# EAGLE board cpu-driver (EAGLE 6.4)
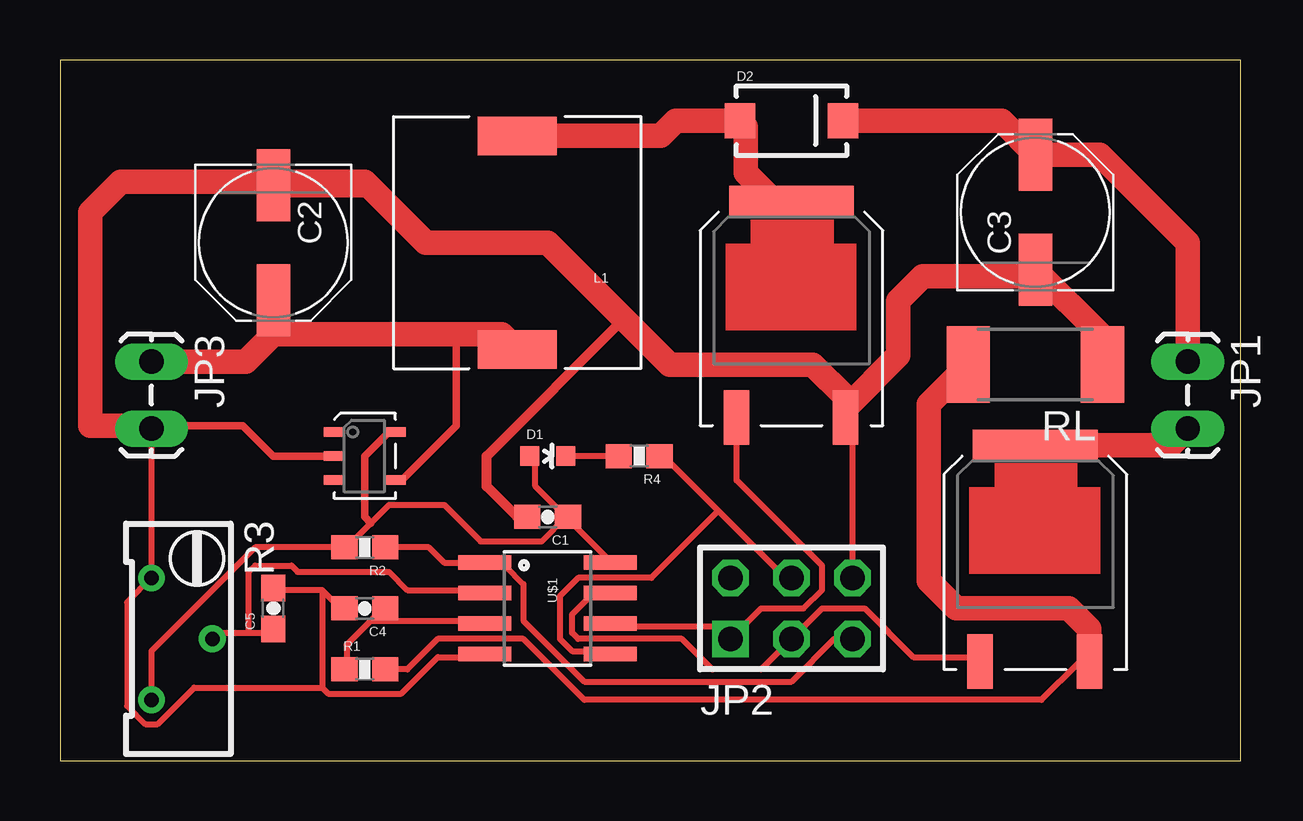
[diagram p0: board, top side]

Size 49.2 x 29.2 mm. Coordinates in mm from the lower left corner, seen from the top.
Outline: 0,0 49.2,0 49.2,29.2 0,29.2 0,0
Copper layers (1*16): Top 0.035mm / dielectric 1.5mm / Bottom 0.035mm
Design rules "default": minimum track width 10mil, minimum drill 0.6mm, track to track 8mil, track to pad 8mil, pad to pad 8mil, via to via 8mil, smd to smd 8mil, copper to edge 40mil, drill to drill 8mil, minimum pad ring 10mil, minimum via ring 8mil, stop-mask expansion 4mil, vias tented up to drill 0mil, thermal gap 10mil

## Footprints (pad centres in the part's own frame; a part is rotated, then mirrored left to right if it is on the bottom)
0603-CAP = smd 1.1 x 1: 1 -0.85,0; 2 0.85,0
PANASONIC_D = smd 3 x 1.4: + 2.4,0; - -2.4,0
LED-0603 = smd 0.8 x 0.8: A 0,-0.75; C 0,0.75
SMA-DIODE = smd 1.27 x 1.47: A -2.15,0; C 2.15,0
1X02_LOCK_LONGPADS = drill 1.016 long: 1 -0.127,0; 2 2.667,0
AVR-ISP-6 = drill 1.016 square: 1 -2.54,-1.27 | drill 1.016 octagon: 2 -2.54,1.27; 3 0,-1.27; 4 0,1.27; 5 2.54,-1.27; 6 2.54,1.27
DR1030 = smd 3.3 x 1.6: 1 0,4.45; 2 0,-4.45
TO-252AA = smd 1.067 x 2.28: 1 -2.3,-4.75; 3 2.25,-4.75 | smd 5.2 x 1.3: 4 0,4.25
0603-RES = smd 1.1 x 1: 1 -0.85,0; 2 0.85,0
RTRIM64Y = drill 0.61: 1 0,-2.54; 2 -2.54,0; 3 0,2.54
R2512 = smd 1.8 x 3.2: 1 -2.8,0; 2 2.8,0
SO08 = smd 0.61 x 2.21: 1 -1.905,-2.616; 2 -0.635,-2.616; 3 0.635,-2.616; 4 1.905,-2.616; 5 1.905,2.616; 6 0.635,2.616; 7 -0.635,2.616; 8 -1.905,2.616
SOT-23-5 = smd 0.406 x 0.813: 1 -1,-1.3; 2 0,-1.3; 3 1,-1.3; 4 1,1.3; 5 -1,1.3

## Placement (x,y rotation side)
C1  1uF  [0603-CAP]  20.32,10.16 180 top
C2  100uF  [PANASONIC_D]  8.89,21.59 270 top
C3  330uF  [PANASONIC_D]  40.64,22.86 90 top
C4  33uF  [0603-CAP]  12.7,6.35 180 top
C5  1uF  [0603-CAP]  8.89,6.35 90 top
D1  RED  [LED-0603]  20.32,12.7 270 top
D2  DIODE-SCHOTTKY_  [SMA-DIODE]  30.48,26.67 0 top
JP1  BOOST-CONN  [1X02_LOCK_LONGPADS]  46.99,16.51 270 top
JP2  AVR-ISP-6  [AVR-ISP-6]  30.48,6.35 0 top
JP3  BATTERY-CONN  [1X02_LOCK_LONGPADS]  3.81,16.51 270 top
L1  180  [DR1030]  19.05,21.59 180 top
Q1  RFD14N05L  [TO-252AA]  30.48,19.05 0 top
Q2  RFD14N05L  [TO-252AA]  40.64,8.89 0 top
R1  100  [0603-RES]  12.7,3.81 0 top
R2  4k7  [0603-RES]  12.7,8.89 180 top
R3  10k  [RTRIM64Y]  3.81,5.08 180 top
R4  220  [0603-RES]  24.13,12.7 180 top
RL  0.2  [R2512]  40.64,16.51 180 top
U$1  ATTINY13SOIC  [SO08]  20.32,6.35 270 top
U$2  [SOT-23-5]  12.7,12.7 270 top

## Library data of the parts
C1 C4 C5 L1 R1 R2 R4 RL = SparkFun-Passives
C2 C3 R3 = resistor
D1 = SparkFun-LED; PROD_ID: DIO-00819
D2 = SparkFun-DiscreteSemi
JP1 JP3 = SparkFun-Connectors
JP2 = avr-4
Q1 Q2 U$2 = Synapseware
U$1 = SparkFun-DigitalIC

## Nets
BOOST+: C3.+ D2.C JP1.1
BOOST-: JP1.2 Q2.4
GND: C1.2 C2.- C3.- C4.2 C5.2 JP2.6 JP3.2 Q1.3 R3.1 RL.1 U$1.4 U$2.2
MISO: JP2.1 Q1.1 U$1.6
MOSI: JP2.4 R4.1 U$1.5
N$1: D1.C R4.2
N$2: D2.A L1.2 Q1.4
N$3: JP2.2
N$1334: Q2.3 R1.2 RL.2
PB3: C5.1 R3.2 U$1.2
PB4: C4.1 R1.1 U$1.3
RES: JP2.5 R2.1 U$1.1
SCK: JP2.3 Q2.1 U$1.7
VBATT: C2.+ JP3.1 L1.1 U$2.4
VCC: C1.1 D1.A R2.2 R3.3 U$1.8 U$2.5

## Tracks (layer width: path | path; a pad name or v marks a point on that pad's centre or on a via)
BOOST+
  Top 1.016: D2.C 39.23,26.67 C3.+ 43.32,25.26 46.99,21.59 JP1.1
BOOST-
  Top 1.016: Q2.4 46.29,13.14 JP1.2
GND
  Top 0.254: 10.92,7.11 8.89,7.11 C5.2 | 10.92,7.11 11.68,6.35 C4.2 | 10.92,3.05 11.18,2.79 14.22,2.79 15.75,4.32 17.53,4.32 U$1.4 | 10.92,7.11 10.92,3.05 | 19.3,10.16 C1.2 | JP3.2 R3.1 2.79,6.6 2.79,2.29 3.56,1.52 4.06,1.52 5.59,3.05 10.92,3.05 | JP2.6 33.02,13.97 Q1.3
  Top 0.305: U$2.2 8.89,12.7 7.62,13.97 3.94,13.97 JP3.2
  Top 0.406: 19.3,10.16 19.05,10.16 17.78,11.43 17.78,12.7 23.5,18.41
  Top 1.016: RL.1 43.44,17.66 C3.- 40.37,20.19 35.94,20.19 34.92,19.18 34.92,16.89 32.73,14.7 Q1.3 32.73,15.15 31.37,16.51 25.4,16.51 23.5,18.41 20.32,21.59 15.24,21.59 12.84,23.99 | C2.- 12.84,23.99 | 12.84,23.99 12.7,24.13 2.54,24.13 1.27,22.86 1.27,13.97 3.68,13.97 JP3.2
MISO
  Top 0.254: U$1.6 23.11,5.59 27.43,5.59 JP2.1 29.21,6.35 30.99,6.35 31.75,7.11 31.75,8.13 28.19,11.68 28.19,14.22 Q1.1
MOSI
  Top 0.254: 27.43,10.41 30.23,7.62 JP2.4 | 27.43,10.41 25.15,12.7 R4.1 | 27.43,10.41 24.64,7.62 21.59,7.62 20.83,6.86 20.83,5.08 21.34,4.57 22.86,4.57 U$1.5
N$1
  Top 0.254: R4.2 D1.C
N$2
  Top 1.016: Q1.4 29.79,23.3 28.57,24.51 28.57,26.43 D2.A 25.65,26.67 25.02,26.04 L1.2
N$1334
  Top 0.254: R1.2 14.48,3.81 15.75,5.08 19.3,5.08 21.84,2.54 40.89,2.54 42.42,4.06 Q2.3
  Top 1.016: Q2.3 42.89,5.5 42.04,6.35 37.34,6.35 36.2,7.49 36.2,14.87 RL.2
PB3
  Top 0.254: 7.87,5.33 6.6,5.33 R3.2 | 7.87,5.33 8.89,5.33 C5.1 | 7.87,5.33 7.87,7.87 8.13,8.13 9.65,8.13 9.91,7.87 13.72,7.87 14.48,7.11 17.53,7.11 U$1.2
PB4
  Top 0.254: 12.95,5.84 13.46,6.35 C4.1 | 12.95,5.84 11.94,4.83 11.94,3.81 R1.1 | 12.95,5.84 17.53,5.84 U$1.3
RES
  Top 0.254: R2.1 15.37,8.89 16,8.26 U$1.1 17.78,8.13 18.54,8.13 19.3,7.37 19.3,5.84 21.84,3.3 30.48,3.3 32.26,5.08 JP2.5
SCK
  Top 0.254: U$1.7 22.86,6.86 22.1,6.86 21.34,6.1 21.34,5.33 21.59,5.08 25.91,5.08 27.18,3.81 29.21,3.81 JP2.3 31.75,6.35 33.53,6.35 35.56,4.32 38.1,4.32 Q2.1
VBATT
  Top 0.305: 16.51,17.78 16.51,13.97 14.24,11.7 U$2.4
  Top 1.016: JP3.1 7.75,16.64 8.89,17.78 | 8.89,17.78 C2.+ | 8.89,17.78 16.51,17.78 18.41,17.78 L1.1
VCC
  Top 0.254: 21.08,10.16 19.81,11.43 19.81,12.7 D1.A | 21.08,10.16 22.86,8.38 U$1.8 | R3.3 3.81,4.57 8.13,8.89 R2.2 11.94,8.89 12.95,9.91 13.72,10.67 16,10.67 17.53,9.14 20.07,9.14 21.08,10.16 | 21.08,10.16 C1.1
  Top 0.305: U$2.5 13.7,13.7 12.7,12.7 12.7,10.16 12.95,9.91